# Altium PCB Power.PcbDoc
Units mm, origin at the board's own origin, x right, y up, seen from the top; angles counter-clockwise.
Board outline 131.06 x 43.05 mm, 2 copper layers (Top Layer, Bottom Layer); 14 components, 40 nets, 66 pads, 2 vias.
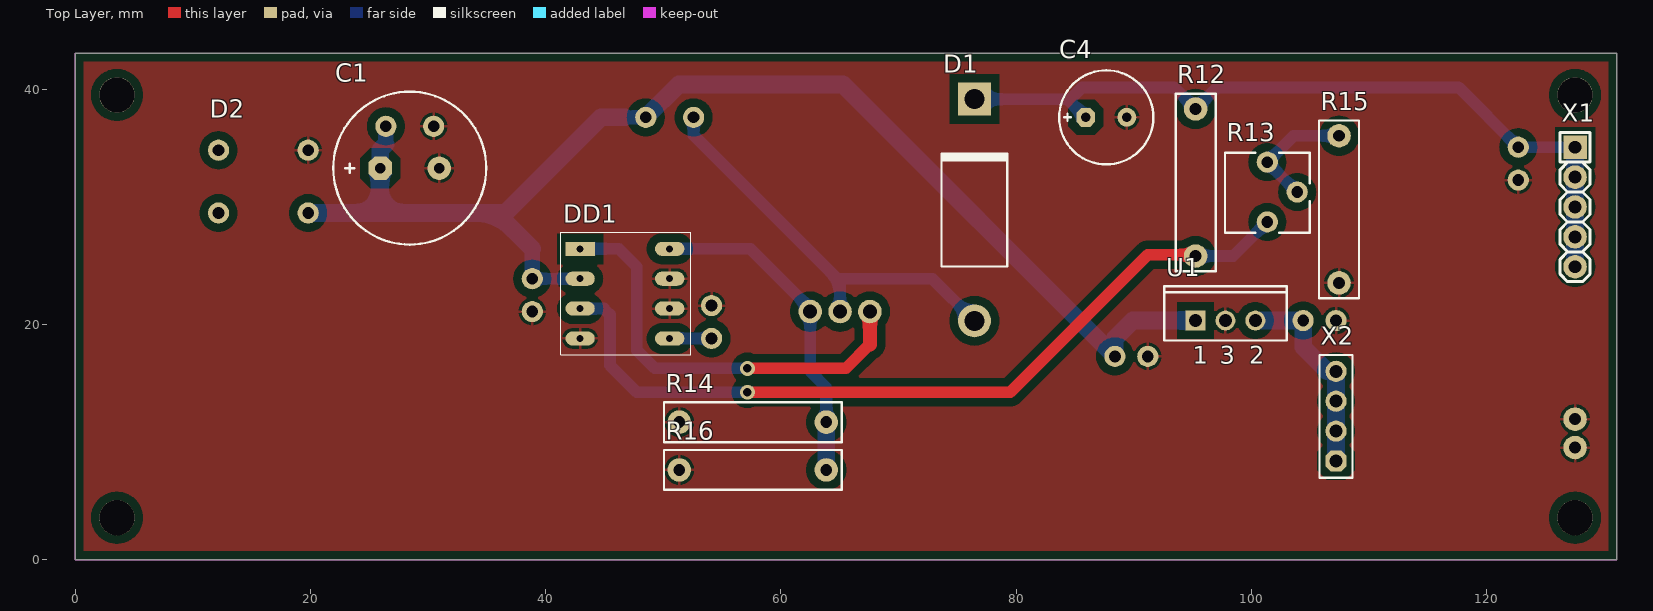
[diagram p0: Top Layer view]
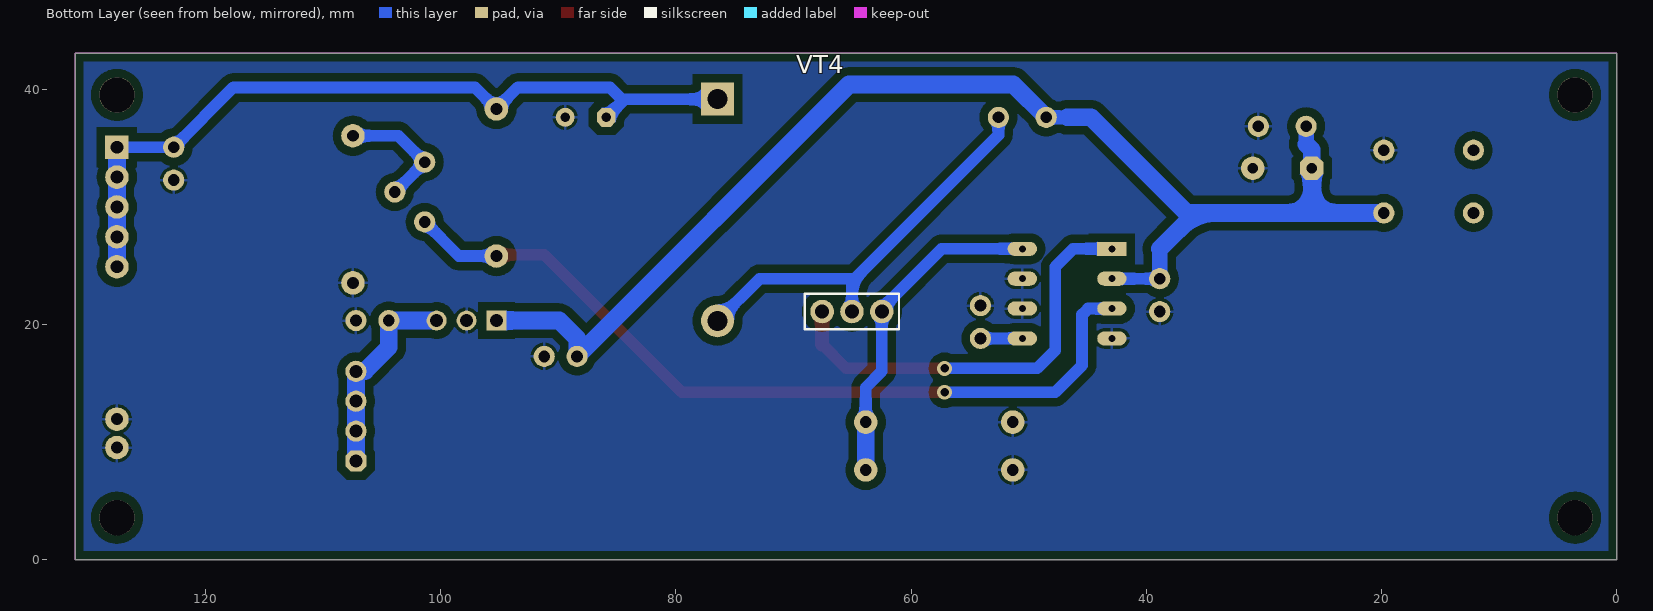
[diagram p1: Bottom Layer view, seen from below]
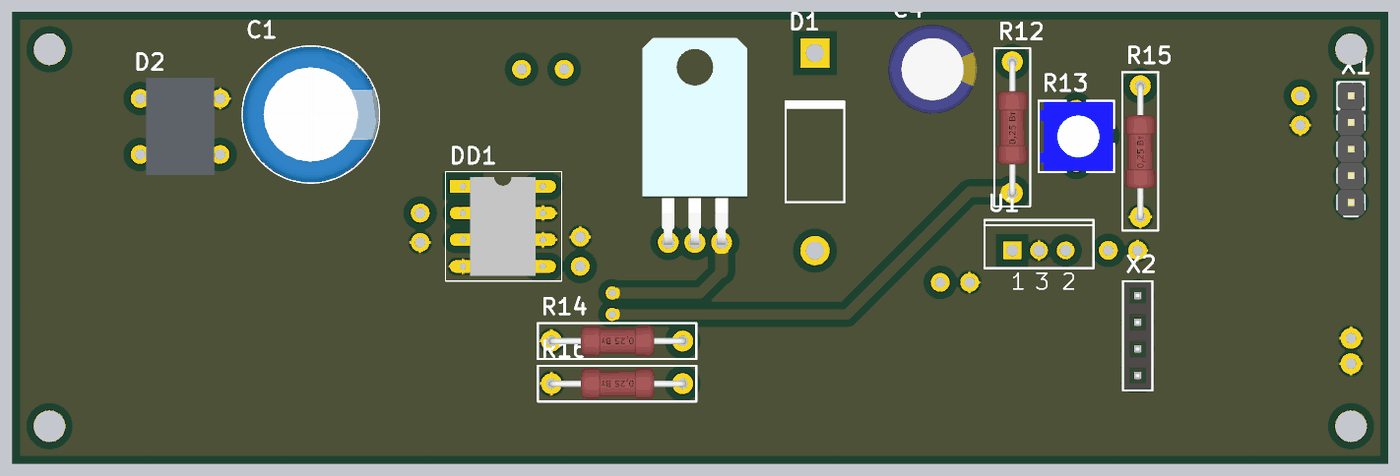
[diagram p2: 3D render of the assembled board from above, using the file's embedded part models]

## Layer stack, top to bottom
Top Solder: solder mask 0.0102, Solder Resist, Dk 3.5
Top Layer: signal copper 0.0356
Dielectric 1: dielectric 0.32, FR-4, Dk 4.8
Bottom Layer: signal copper 0.0356
Bottom Solder: solder mask 0.0102, Solder Resist, Dk 3.5

## Board outline
0,0 131.064,0 131.064,43.053 0,43.053

## Design rules (kind name [scope] priority, off if disabled: settings)
Clearance [All] p1: gap=0.7 ignorepadtopadclearanceinfootprint=FALSE except(0: Arc-Hole Track-Hole SMDPad-Hole THPad-Hole Via-Hole Fill-Hole Poly-Hole Region-Hole Text-Hole)
PolygonConnect [All] p1: connectstyle=Relief reliefconductorwidth=0.254 reliefentries=4 polygonreliefangle="90 Angle" airgapwidth=0.254
RoutingVias [All] p1: holewidth=0.711 width=1.27 viastyle="Through Hole" minholewidth=0.711 minwidth=1.27 maxholewidth=0.711 maxwidth=1.27
SolderMaskExpansion [All] p1: expansion=0.102
Width [All] p1 off: maxlimit=0.254 minlimit=0.254 preferedwidth=0.254
30 further rules are at their usual default settings.

## Classes and differential pairs
component class "Плата питания": C4 D2 DD1 R12 R14 R15 U1 VT4

## Components (designator, comment, footprint, x,y, rotation, side; value= is the part's Value field where it differs from the comment)
C1 "Comment" D13C5H25 28.448,33.274 r0 top
C4 "4.7u" D8C3.5H12 87.658,37.592 r0 top
D1 "Diode SF28" DO-201AD 76.454,29.718 r90 top
D2 "Comment" Diode_bridge_DB1 16.002,32.131 r180 top
DD1 "MAX1771" "MAX1771_DIP8 - duplicate" 42.926,26.416 r0 top
R12 "1.5M" MLT 95.25,32.004 r270 top
R13 "Comment" "RES: 3362P" 101.346,33.782 r270 top
R14 "0.05" MLT 57.658,11.684 r0 top
R15 "10k" MLT 107.442,29.718 r270 top
R16 "0.05" MLT 57.658,7.62 r0 top (schematic designator R14)
U1 "GL7805" TO220VW 97.79,20.32 r0 top
VT4 "IRF740" TO220_123_H 65.024,21.082 r180 bottom
X1 "Comment" "CON: PLS-5" 127.508,29.972 r270 top
X2 "Comment" "CON: PBS-4" 107.188,12.192 r90 top

## Footprints (in the part's own frame and the unit in brackets; to place one, negate y for a bottom-side part, rotate by r counter-clockwise, add the part's x,y. Pads: shape width x height; smd on the part's side, far side on the other; paste and mask are expansions set on the pad)
"CON: PBS-4" [mm] "PBS-5"
  oct 1.8x1.8 hole 1.1: 1(-3.81,0)
  round 1.8 hole 1.1: 2(-1.27,0) 3(1.27,0) 4(3.81,0)
  silkscreen extent -5.23,-1.4 5.2,1.4, body extent -5.08,-1.27 5.08,1.27, height 8.4
"CON: PLS-5" [mm]
  rect 2x2 hole 1.1: 1(-5.08,0)
  round 2 hole 1.1: 2(-2.54,0) 3(0,0) 4(2.54,0) 5(5.08,0)
  silkscreen extent -6.35,-1.27 6.35,1.27, body extent -6.35,-1.27 6.35,1.27, height 8.54
D8C3.5H12 [mm] "Polar capacitor, diameter 8 mm, leads clearance 3.5 mm, height 12 mm"
  oct 1.6x1.6 hole 0.8: 1(-1.75,0)
  round 1.6 hole 0.8: 2(1.75,0)
  silkscreen extent -4,-4 4,4, body extent -4.25,-4.25 4.25,4.25, height 13
D13C5H25 [mm] "Polar capacitor, diameter 13 mm, leads clearance 5 mm, height 25 mm"
  oct 2x2 hole 0.9: 1(-2.5,0)
  round 2 hole 0.9: 2(2.5,0)
  silkscreen extent -6.5,-6.5 6.5,6.5, body extent -6.5,-6.5 6.5,6.5, height 25
Diode_bridge_DB1 [mm]
  round 1.8 hole 1: 23(-3.81,2.667) 24(-3.81,-2.667) 25(3.81,2.667) 26(3.81,-2.667)
  body extent -3.25,-4.65 3.25,4.65, height 7.6
DO-201AD [mm] "Diode, Axial; Body 9.5 x 5.6 mm (LxDia. max), Lead Dia. 1.32 mm (max)"
  round 2.8 hole 1.7: 1(-9.42,0)
  rect 2.8x2.8 hole 1.7: 2(9.42,0)
  silkscreen extent -4.8,-2.8 4.9,2.8
"MAX1771_DIP8 - duplicate" [mm]
  rect 2.5x1.2 hole 0.6: 1(0,0)
  oval 2.5x1.2 hole 0.6: 2(0,-2.54) 3(0,-5.08) 4(0,-7.62) 5(7.62,-7.62) 6(7.62,-5.08) 7(7.62,-2.54) 8(7.62,0)
  silkscreen extent -1.65,-9.02 9.4,1.4, body extent 0.71,-8.51 6.91,0.89, height 4.36
MLT [mm]
  round 2 hole 1: 1(-6.3,0) 2(6.2,0)
  silkscreen extent -7.6,-1.7 7.5,1.7, body extent -6.55,-1.5 6.55,1.5, height 3.5
"RES: 3362P" [mm]
  round 1.8 hole 1: 1(0,0) 2(2.54,2.54) 3(5.08,0)
  silkscreen extent -0.8,-3.6 6,3.6, body extent -0.7,-3.49 5.9,3.5, height 4.5
TO220_123_H [mm] "Generic TO-220 case, stay variant"
  round 2 hole 1.2: 1(-2.54,0) 2(0,0) 3(2.54,0)
  round 0.5 on Bottom Overlay: ""(-4.5,-1.3)
  round 0.5 on Mech2: ""(-3.5,-1)
  silkscreen extent -4,-1.5 4,1.5, body extent -5,-0.2 5,19.5, height 1.2
TO220VW [mm] "TO, Thru-Hole, Vertical, Heatsink Mounted; 3 In-Line Leads; Pitch 2.54 mm; Pin sequence 1, 3, 2"
  rect 1.7x1.7 hole 1.1: 1(-2.54,0)
  round 1.7 hole 1.1: 2(2.54,0) 3(0,0)
  silkscreen extent -5.2,-1.7 5.2,2.9

## Part data
C4: library part AlumCap
D1: library part "Diode 1N5402", "3 Amp General Purpose Rectifier", ComponentLink1Description="Manufacturer Link", ComponentLink1URL=http://www.fairchildsemi.com/, ComponentLink2Description=Datasheet, ComponentLink2URL=http://www.fairchildsemi.com/ds/1N%2F1N5400.pdf, DatasheetVersion=1998, LatestRevisionDate=17-Jul-2002, LatestRevisionNote="Re-released for DXP Platform.", PackageDescription="Diode, Axial; Body 9.5 x 5.6 mm (LxDia. max), Lead Dia. 1.32 mm (max)", PackageReference=DO-201AD, PackageVersion=Aug-1999, Published=8-Jun-2000, Publisher="Altium Limited"
R12 R14 R15 R16: library part Resistor, "MLT"
U1: library part L78S05CV, "2A Positive Voltage Regulator", ComponentLink1Description="Manufacturer Link", ComponentLink1URL=http://www.st.com/, ComponentLink2Description=Datasheet, ComponentLink2URL=http://www.st.com/stonline/products/literature/ds/2148/l78s10c.pdf, DatasheetVersion=Jan-1993, LatestRevisionDate=17-Jul-2002, LatestRevisionNote="Re-released for DXP Platform.", Note="Tab is connected to pin 3 (GND).", PackageDescription="TO, Thru-Hole, Vertical, Heatsink Mounted; 3 In-Line Leads; Pitch 2.54 mm; Pin sequence 1, 3, 2", PackageReference=TO220VW, PackageVersion=Apr-1998, Published=24-Aug-2001, Publisher="Altium Limited"
VT4: library part N-chanel, "Mosfet"

## Free pads (board coordinates)
  round 3 hole 3: 2(3.556,3.556) 2(3.556,39.497) 2(127.508,3.556) 2(127.508,39.497)
  round 2 hole 1: 15(127.508,9.525) 15(127.508,11.938)
  round 1.8 hole 1: 21(26.416,36.83) 21(38.862,21.082) 21(48.514,37.592) 21(54.102,21.59) 21(88.392,17.272) 21(104.394,20.32) 21(122.682,35.052) 22(30.48,36.83) 22(38.862,23.876) 22(52.578,37.592) 22(54.102,18.796) 22(91.186,17.272) 22(107.188,20.32) 22(122.682,32.258)

## Via types
v1: diameter 1.27, hole 0.711, Top Layer to Bottom Layer, 2 vias

## Nets (pads, with @x,y where several pads share a name; then routed paths per layer and width w, separated by ;. In a path a pad name is that pad's centre, name@x,y a point inside that pad or via, vN(x,y) a via of type N, cw(c..) or ccw(c..) an arc to the next point about the centre after c; other vN are vias at no path point)
+5В: pad.21@104.394,20.32 U1.2 X2.1 X2.2 X2.3 X2.4 | length 17.6
  Bottom Layer w1.5: U1.2 104.394,20.32 104.394,18.034 106.426,16.002 X2.4 X2.3 X2.2 X2.1
+20В: C1.1 D2.23 DD1.2 pad.21@26.416,36.83 pad.21@48.514,37.592 pad.21@88.392,17.272 pad.22@38.862,23.876 U1.1 | length 110.4
  Bottom Layer w0.9: DD1.2 DD1.2@43.18,23.876
  Bottom Layer w1: pad.22@38.862,23.876 DD1.2
  Bottom Layer w1.2: 46.736,37.592 pad.21@48.514,37.592
  Bottom Layer w1.3: 26.416,35.306 pad.21@26.416,36.83 ; pad.22@38.862,23.876 38.862,26.416
  Bottom Layer w1.5: D2.23 25.908,29.464 ; 26.416,35.306 25.948,34.838 C1.1 25.908,33.234 25.908,29.464 ; 38.862,26.416 35.814,29.464 ; 46.736,37.592 44.704,37.592 36.576,29.464 35.814,29.464 ; pad.21@48.514,37.592 51.308,40.386 65.278,40.386 88.392,17.272 88.392,18.796 89.916,20.32 U1.1 ; 25.908,29.464 35.814,29.464
+180В: C4.1 D1.2 pad.21@122.682,35.052 R12.1 X1.1 X1.2 X1.3 X1.4 X1.5 | length 67.4
  Bottom Layer w1: D1.2 84.362,39.138 84.483,39.017 ; C4.1 84.483,39.017 ; X1.1@127.254,35.052 122.682,35.052 117.602,40.132 97.078,40.132 R12.1 93.422,40.132 85.598,40.132 84.483,39.017
  Bottom Layer w1.5: X1.1@127.254,35.052 X1.1 X1.2 X1.5
GND: C1.2 C4.2 D2.24 DD1.4 DD1.6 DD1.7 pad.15 pad.21@38.862,21.082 pad.21@54.102,21.59 pad.22@30.48,36.83 pad.22@91.186,17.272 pad.22@107.188,20.32 pad.22@122.682,32.258 R14.1 R15.2 R16.1 U1.3
L1: 
L2: 
L3: 
L4: 
L5: 
L6: 
L7: 
L8: 
L9: 
L10: 
NetC5_1: DD1.5 pad.22@54.102,18.796 | length 3.6
  Bottom Layer w1: DD1.5 pad.22@54.102,18.796
NetD1_1: D1.1 pad.22@52.578,37.592 VT4.2 | length 34.8
  Bottom Layer w1: pad.22@52.578,37.592 52.578,36.068 65.024,23.622 ; VT4.2 65.024,23.622 ; D1.1 72.876,23.876 65.024,23.876 65.024,23.622
NetDD1_1: DD1.1 VT4.1 | length 36.6
  Top Layer w1: v1(57.15,16.256) 65.532,16.256 67.564,18.288
  Top Layer w1.2: 67.564,18.288 VT4.1
  Bottom Layer w1: DD1.1 46.228,26.416 47.752,24.892 47.752,17.78 49.276,16.256 v1(57.15,16.256)
NetDD1_3: DD1.3 R12.2 R13.3 | length 70
  Top Layer w1: v1(57.15,14.224) 79.502,14.224 91.186,25.908 95.146,25.908 R12.2
  Bottom Layer w1: DD1.3 44.958,21.336 45.466,20.828 45.466,16.51 47.752,14.224 v1(57.15,14.224) ; R12.2 98.448,25.804 R13.3
NetDD1_8: DD1.8 R14.2 R16.2 VT4.3 | length 28.3
  Bottom Layer w1: DD1.8 57.404,26.416 62.484,21.336 VT4.3 62.484,16.002 63.858,14.628 R14.2
  Bottom Layer w1.5: R16.2 R14.2
NetHG1_11: 
NetHG2_11: 
NetHG3_11: 
NetHG4_11: 
NetHG5_2: 
NetR1_1: 
NetR1_2: 
NetR2_1: 
NetR2_2: 
NetR3_1: 
NetR3_2: 
NetR4_2: 
NetR5_2: 
NetR6_2: 
NetR7_2: 
NetR8_2: 
NetR9_2: 
NetR10_2: 
NetR11_2: 
NetR13_2: R13.1 R13.2 R15.1 | length 10.6
  Bottom Layer w1: R13.2 R13.1 103.582,36.018 R15.1
VCC: 
pads on no net: D2.25 D2.26 VT4.

## Polygon pours and split planes (outlines as drawn)
GND on Bottom Layer "Bottom layer" (solid, remove dead copper, pour order 4): 0,43.053 0.127,42.926 131.064,42.926 131.064,0 0,0
GND on Top Layer "Top layer" (solid, remove dead copper, pour order 6): 0,43.053 0,0 131.064,0 131.064,43.053

## Keep-outs
Keep-Out Layer:
  the board outline again, w0.1

## Text inside footprints (layer, text, board x,y; h text height)
U1: Top Overlay "1" at 95,16.645 h1.5; Top Overlay "2" at 99.83,16.645 h1.5; Top Overlay "3" at 97.29,16.645 h1.5